# EAGLE board pc1000-001 (EAGLE 9.1.0)
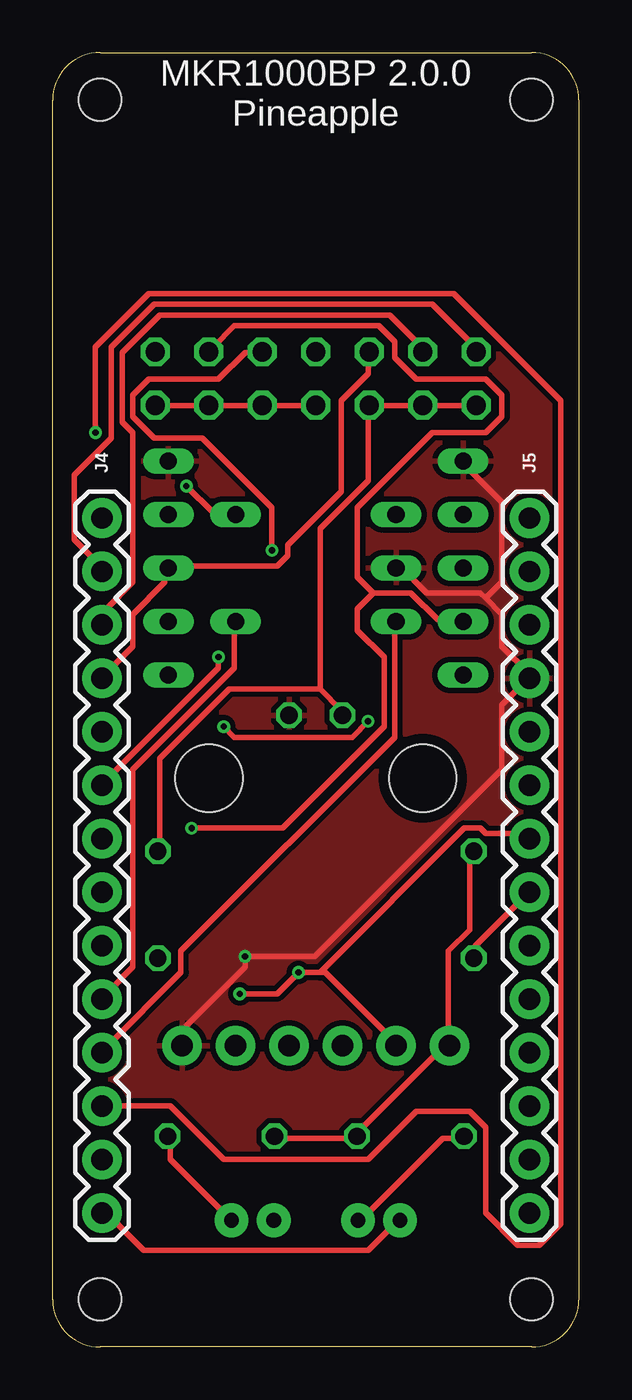
[diagram p0: board, top side]
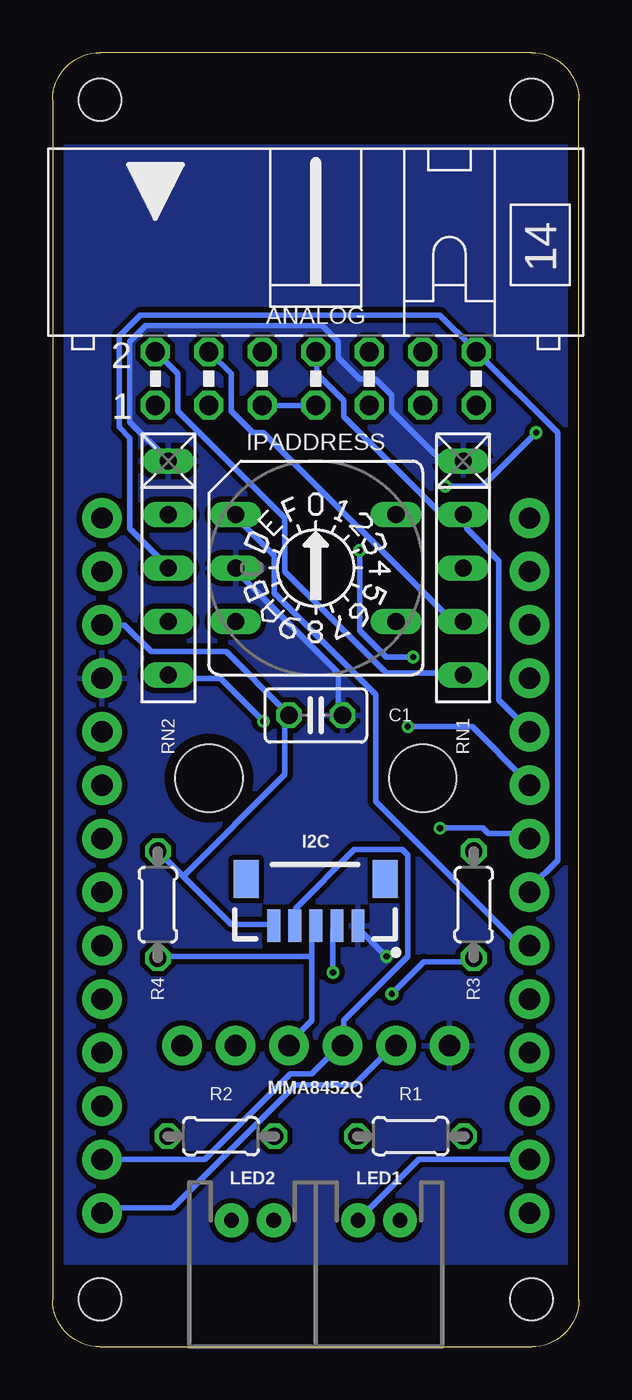
[diagram p1: board, bottom side, seen from below]

Size 25 x 61.5 mm. Coordinates in mm from the lower left corner, seen from the top.
Outline: 0,2.25 0,59.25 arc-90 2.25,61.5 22.75,61.5 arc-90 25,59.25 25,2.25 arc-90 22.75,0 2.25,0 arc-90 0,2.25
Copper layers (1*16): Top 0.035mm / dielectric 1.53mm / Bottom 0.035mm
Design rules "pban_5mil-l2": minimum track width 5mil, minimum drill 0.3mm, track to track 5mil, track to pad 0.229mm, pad to pad 5mil, via to via 5mil, smd to smd 5mil, copper to edge 0.5mm, drill to drill 0.5mm, minimum pad ring 0.15mm, minimum via ring 0.15mm, stop-mask expansion 4mil, vias tented up to drill 0.35mm, thermal gap 10mil
Net classes: 0 default: width 0.254 mm, drill 0.254 mm, clearance 0.254 mm
Holes 2 mm at 2.25,59.26 22.75,59.26 22.75,2.26 2.25,2.26
Holes 3.2 mm at 17.58,27.01 7.42,27.01
bRestrict: area 0.3,57.3 to 4.2,61.2; area 20.8,57.3 to 24.7,61.2; 4 lines

## Footprints (pad centres in the part's own frame; a part is rotated, then mirrored left to right if it is on the bottom)
ML14L = drill 0.914 octagon: 1 -7.62,-1.27; 2 -7.62,1.27; 3 -5.08,-1.27; 4 -5.08,1.27; 5 -2.54,-1.27; 6 -2.54,1.27; 7 0,-1.27; 8 0,1.27; 9 2.54,-1.27; 10 2.54,1.27; 11 5.08,-1.27; 12 5.08,1.27; 13 7.62,-1.27; 14 7.62,1.27
C025-025X050 = drill 0.813 octagon: 1 -1.27,0; 2 1.27,0
1X05_1MM = smd 0.6 x 1.55: 1 -2,0; 2 -1,0; 3 0,0; 4 1,0; 5 2,0 | smd 1.2 x 1.8: NC1 -3.3,2.225; NC2 3.3,2.225
A1353HEX = drill 0.813 long: 1 3.81,-2.54; 2 -3.81,2.54; 4 3.81,2.54; 8 -3.81,-2.54; C 3.81,0
1X14 = drill 1.016 pad 1.88: 1 0,0; 2 2.54,0; 3 5.08,0; 4 7.62,0; 5 10.16,0; 6 12.7,0; 7 15.24,0; 8 17.78,0; 9 20.32,0; 10 22.86,0; 11 25.4,0; 12 27.94,0; 13 30.48,0; 14 33.02,0
JST-2-PTH-NS = drill 0.7 pad 1.6: 1 -1,0; 2 1,0
1X06_NO_SILK = drill 1.016 pad 1.88: 1 0,0; 2 2.54,0; 3 5.08,0; 4 7.62,0; 5 10.16,0; 6 12.7,0
0204/5 = drill 0.813 octagon: 1 -2.54,0; 2 2.54,0
RN-5 = drill 0.813 long: 1 -5.08,0; 2 -2.54,0; 3 0,0; 4 2.54,0; 5 5.08,0

## Placement (x,y rotation side)
ANALOG  [ML14L]  12.5,46.01 0 bottom
C1  0.1u  [C025-025X050]  12.5,30.01 0 bottom
I2C  3.3V  [1X05_1MM]  12.5,20.01 0 bottom
IPADDRESS  [A1353HEX]  12.5,37.01 180 bottom
J4  DNP  [1X14]  2.34,39.38 270 top
J5  DNP  [1X14]  22.66,6.36 90 top
LED1  [JST-2-PTH-NS]  9.5,6.01 180 bottom
LED2  [JST-2-PTH-NS]  15.5,6.01 180 bottom
MMA8452Q  [1X06_NO_SILK]  18.85,14.31 0 bottom
R1  680  [0204/5]  8,10.01 180 bottom
R2  680  [0204/5]  17,10.01 0 bottom
R3  6.8k  [0204/5]  5,21.01 90 bottom
R4  6.8k  [0204/5]  20,21.01 90 bottom
RN1  10k  [RN-5]  5.5,37.01 270 bottom
RN2  10k  [RN-5]  19.5,37.01 270 bottom

## Library data of the parts
ANALOG = con-ml; OC_FARNELL: unknown; OC_NEWARK: unknown
C1 R1-R4 = resistor
I2C = SparkFun-Connectors; PROD_ID: CONN-08528; SF_ID: GPS-08288
IPADDRESS = switch-dil; OC_FARNELL: unknown; OC_NEWARK: unknown
J4 J5 LED1 LED2 = SparkFun-Connectors
MMA8452Q = SparkFun-Connectors; PROD_ID: CONN-08437
RN1 RN2 = resistor-net; OC_FARNELL: unknown; OC_NEWARK: unknown

## Nets
A0: ANALOG.2 J4.2 RN1.5
A1: ANALOG.4 J4.3 RN1.4
A2: ANALOG.6 J4.4 RN1.3
A3: ANALOG.8 J4.5 RN1.2
A4: ANALOG.10 J4.6 RN2.5
A5: ANALOG.12 J4.7 RN2.4
A6: ANALOG.14 J4.8 RN2.3
D0: IPADDRESS.1 J4.9
D1: IPADDRESS.2 J4.10
D2: IPADDRESS.4 J4.11
D3: IPADDRESS.8 J4.12
D6: J5.1 MMA8452Q.5
D7: I2C.2 J5.2 MMA8452Q.4
GND: C1.2 I2C.5 IPADDRESS.C J5.11 MMA8452Q.6 RN1.1 RN2.1
LED1A: LED1.1 R1.1
LED1K: J4.13 LED1.2
LED2A: LED2.1 R2.1
LED2K: J4.14 LED2.2
SCL: I2C.3 J5.7 MMA8452Q.3 R4.1
SDA: I2C.4 J5.8 MMA8452Q.2 R3.1
VCC: ANALOG.1 ANALOG.3 ANALOG.5 ANALOG.7 ANALOG.9 ANALOG.11 ANALOG.13 C1.1 I2C.1 J5.12 MMA8452Q.1 R1.2 R2.2 R3.2 R4.2

## Tracks (layer width: path | path; a pad name or v marks a point on that pad's centre or on a via)
A0
  Top 0.254: J4.2 2.29,37.1 1.02,38.37 1.02,41.41 2.79,43.19 2.79,47.51 4.83,49.54 18.03,49.54 20.07,47.51 ANALOG.2
  Bottom 0.254: RN1.5 5.59,32.02 9.14,32.02 13.97,36.84 13.97,39.38 19.05,44.46 19.05,46.24 20.07,47.26 ANALOG.2
A1
  Top 0.254: J4.3 2.54,34.56 2.54,35.06 3.81,36.33 3.81,43.45 3.3,43.95 3.3,47.26 5.08,49.03 16,49.03 17.53,47.51 ANALOG.4
  Bottom 0.254: RN1.4 5.59,34.56 6.1,34.56 14.99,43.45 15.49,43.45 16.51,44.46 16.51,46.24 17.53,47.26 ANALOG.4
A2
  Top 0.254: J4.4 2.54,32.02 3.81,33.29 3.81,34.81 5.33,36.33 5.33,36.84 RN1.3 5.59,37.1 10.67,37.1 11.18,37.6 11.18,38.11 13.72,40.65 13.72,44.97 14.99,46.24 14.99,47.26 ANALOG.6
A3
  Bottom 0.254: J4.5 2.54,29.48 3.81,30.75 3.81,37.35 5.33,38.87 5.33,39.38 RN1.2 5.59,39.64 6.6,39.64 11.18,44.21 11.18,44.97 12.45,46.24 12.45,47.26 ANALOG.8
A4  (via drill 0.3)
  Top 0.254: v14.99,29.73 14.22,28.97 8.64,28.97 v8.13,29.48 | v10.41,37.86 10.41,39.89 7.11,43.19 4.83,43.19 3.81,44.21 3.81,45.22 4.57,45.99 7.87,45.99 9.14,47.26 9.91,47.26 ANALOG.10 | v7.87,32.78 7.87,32.27 2.54,26.94 J4.6
  Bottom 0.254: v14.99,29.73 17.02,31.76 19.3,31.76 RN2.5 | v8.13,29.48 5.08,29.48 2.54,26.94 J4.6 | v10.41,37.86 10.41,34.05 9.14,32.78 v7.87,32.78
A5  (via drill 0.3)
  Top 0.254: 15.24,35.83 17.02,35.83 18.29,34.56 19.3,34.56 RN2.4 | 15.24,35.83 14.48,36.59 14.48,39.89 18.03,43.45 20.57,43.45 21.34,44.21 21.34,45.22 20.57,45.99 17.27,45.99 16.26,47 16.26,47.76 15.49,48.53 8.64,48.53 7.62,47.51 ANALOG.12 | v6.6,24.65 10.92,24.65 15.75,29.48 15.75,32.78 14.48,34.05 14.48,35.06 15.24,35.83
  Bottom 0.254: v6.6,24.65 4.57,24.65 4.32,24.4 2.54,24.4 J4.7
A6
  Bottom 0.254: RN2.3 19.56,37.1 21.34,38.87 21.34,43.19 21.84,43.7 21.84,48.02 20.83,49.03 6.6,49.03 5.08,47.51 ANALOG.14 4.83,47.26 1.02,43.45 1.02,23.13 2.29,21.86 J4.8
D0
  Bottom 0.254: IPADDRESS.1 16.26,39.38 14.48,37.6 14.48,35.83 9.65,31 9.65,25.92 3.05,19.32 2.54,19.32 J4.9
D1
  Top 0.254: IPADDRESS.2 8.64,34.3 8.64,32.27 3.81,27.44 3.81,18.05 2.54,16.78 J4.10
D2
  Top 0.254: IPADDRESS.4 16.26,34.3 16.26,28.97 6.1,18.81 6.1,17.79 2.54,14.24 J4.11
D3  (via drill 0.3)
  Top 0.254: v6.35,40.91 7.62,39.64 8.64,39.64 IPADDRESS.8 | v2.03,43.45 2.03,47.51 4.57,50.05 19.05,50.05 24.13,44.97 24.13,5.85 23.11,4.84 22.1,4.84 20.57,6.36 20.57,10.43 19.81,11.19 17.27,11.19 14.99,8.9 8.13,8.9 5.59,11.44 2.54,11.44 J4.12
  Bottom 0.254: v6.35,40.91 4.57,40.91 v2.03,43.45
D6
  Bottom 0.254: J5.1 22.61,6.62 19.3,6.62 13.46,12.46 10.67,12.46 8.89,14.24 MMA8452Q.5
D7
  Bottom 0.254: I2C.2 13.46,20.08 13.46,20.84 10.67,23.63 8.38,23.63 8.13,23.38 8.13,18.55 11.18,15.51 11.18,14.49 MMA8452Q.4 11.43,14.24 12.7,12.97 13.72,12.97 17.78,8.9 22.61,8.9 J5.2
GND  (via drill 0.3)
  Top 0.254: MMA8452Q.6 6.35,14.49 6.35,15.25 9.14,18.05 v9.14,18.55 12.45,18.55 21.34,27.44 21.34,30.49 22.61,31.76 J5.11 22.61,32.02 21.34,33.29 21.34,34.81 20.57,35.57 | 20.57,35.57 20.32,35.83 17.78,35.83 16.51,37.1 IPADDRESS.C | 20.57,35.57 21.34,36.33 21.34,40.14 19.56,41.92 RN2.1
  Bottom 0.254: RN1.1 5.59,42.18 6.6,42.18 8.89,44.46 8.89,45.22 9.65,45.99 10.41,45.99 11.43,47 11.43,47.76 12.19,48.53 20.57,48.53 21.34,47.76 21.34,43.95 19.56,42.18 RN2.1 | v9.14,18.55 10.41,19.82 I2C.5 | C1.2 11.43,30.24 11.43,32.02 16.26,36.84 IPADDRESS.C
  pour Top: 0,4.01 25,4.01 25,57.01 0,57.01
  pour Bottom: 0,4.01 25,4.01 25,57.01 0,57.01
LED1A
  Top 0.254: R1.1 5.59,9.92 5.59,8.9 8.38,6.11 LED1.1
LED1K
  Bottom 0.254: LED1.2 10.41,6.11 7.62,8.9 2.54,8.9 J4.13
LED2A
  Top 0.254: R2.1 19.3,9.92 18.54,9.92 14.73,6.11 LED2.1
LED2K
  Top 0.254: LED2.2 16.26,5.85 14.99,4.58 4.32,4.58 2.54,6.36 J4.14
SCL
  Top 0.254: R4.1 20.07,18.55 20.07,19.06 22.61,21.6 J5.7
  Bottom 0.254: 12.7,18.55 12.7,15.51 13.72,14.49 MMA8452Q.3 | 12.7,18.55 12.7,19.82 I2C.3 | 12.7,18.55 19.81,18.55 R4.1
SDA  (via drill 0.3)
  Top 0.254: 12.7,17.79 12.95,17.79 16.26,14.49 MMA8452Q.2 | 12.7,17.79 v11.68,17.79 10.67,16.78 v8.89,16.78 | 12.7,17.79 19.56,24.65 20.32,24.65 20.57,24.4 22.61,24.4 J5.8
  Bottom 0.254: v11.68,17.79 11.68,19.82 I2C.4 | v8.89,16.78 7.37,18.3 5.08,18.3 R3.1
VCC
  Top 0.254: R1.2 10.67,9.92 14.22,9.92 R2.2 14.48,10.17 18.8,14.49 | 18.8,14.49 MMA8452Q.1 18.8,14.49 | 18.8,14.49 18.8,18.81 19.81,19.82 19.81,23.38 R4.2 | ANALOG.13 5.08,44.72 7.37,44.72 ANALOG.11 7.62,44.72 9.91,44.72 ANALOG.9 10.16,44.72 12.45,44.72 ANALOG.7 | ANALOG.1 20.07,44.72 17.78,44.72 ANALOG.3 17.53,44.72 15.24,44.72 ANALOG.5 14.99,44.72 14.99,41.16 12.7,38.87 12.7,31.25 | 12.7,31.25 8.38,31.25 5.08,27.95 5.08,23.63 R3.2 | 12.7,31.25 13.72,30.24 C1.1
  Bottom 0.254: 18.8,22.36 19.81,23.38 R4.2 | 18.8,22.36 16.51,20.08 14.73,20.08 I2C.1 | ANALOG.5 14.99,44.72 12.7,44.72 ANALOG.7 | J5.12 22.61,34.3 21.59,34.3 20.32,33.03 16.76,33.03 13.97,30.24 C1.1 13.97,29.98 13.97,27.19 18.8,22.36

## Text on the board
tNames: MKR1000BP 2.0.0 / Pineapple